# Altium PCB walle-eye-stereo.PcbDoc (part 1 of 2)
Units mil, origin at the board's own origin, x right, y up, seen from the top; angles counter-clockwise.
Board outline 1865.45 x 699.12 mil, 4 copper layers (Top Layer, SIG1, SIG2, Bottom Layer), stack 23.756 mil thick; 36 components, 55 nets, 245 pads, 155 vias.
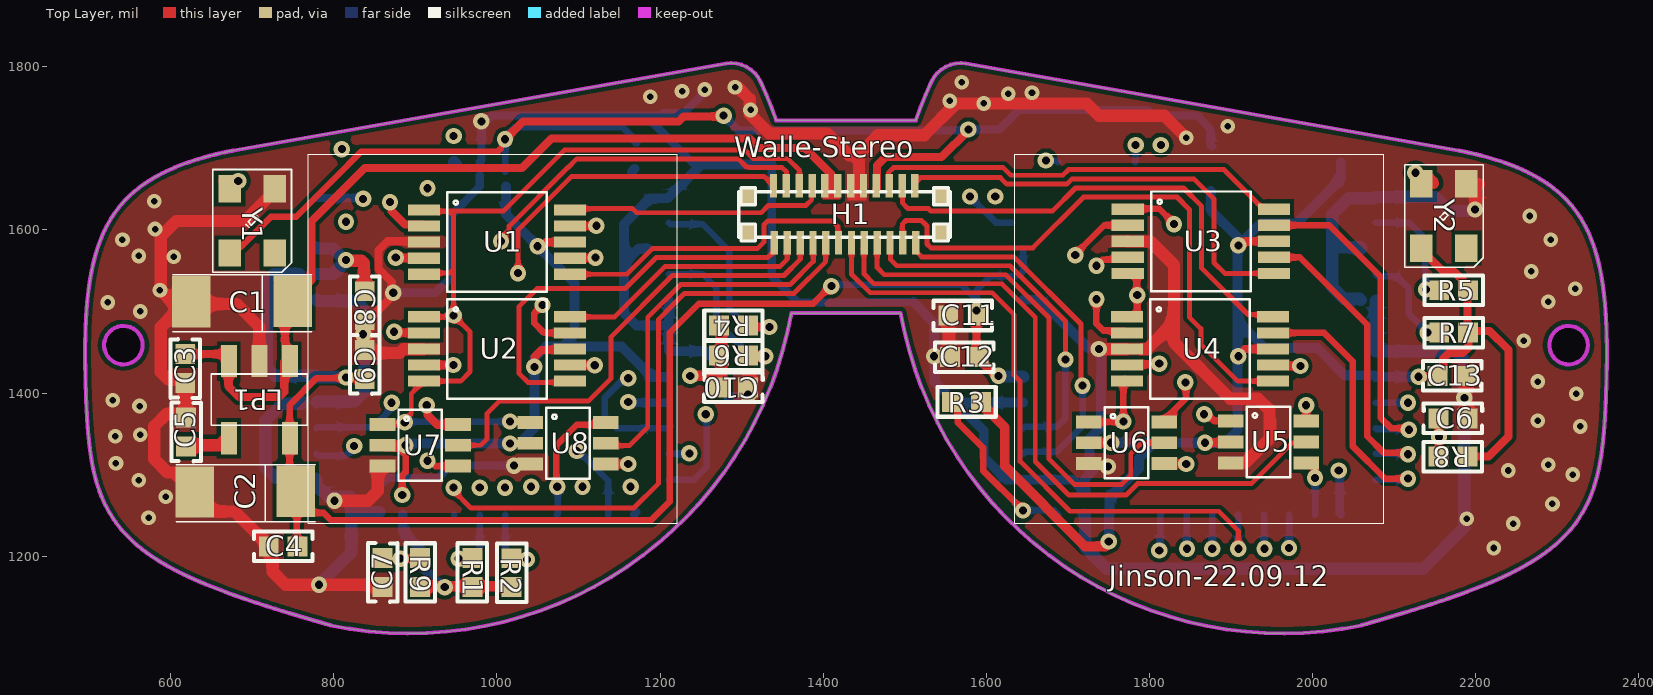
[diagram p0: Top Layer view]
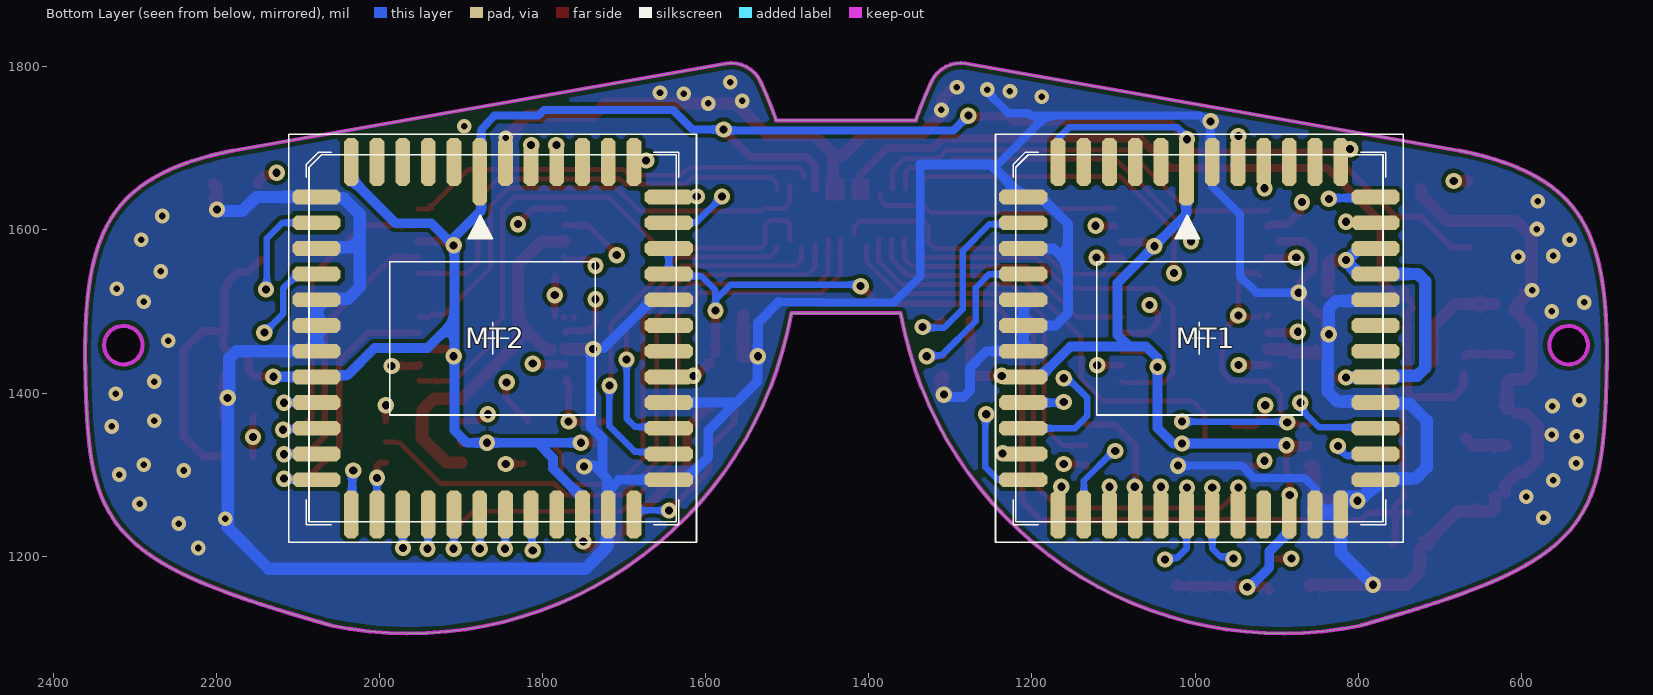
[diagram p1: Bottom Layer view, seen from below]
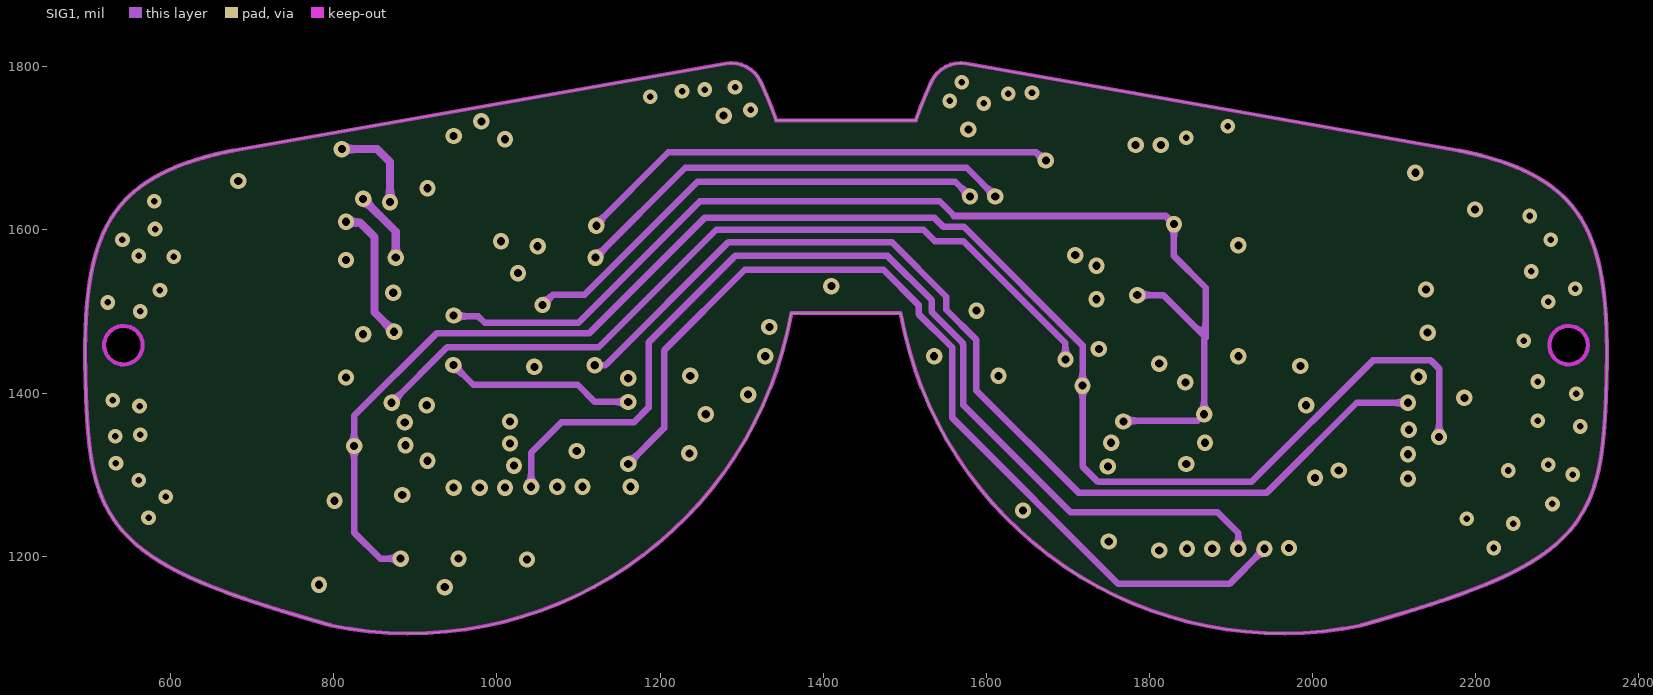
[diagram p2: SIG1]
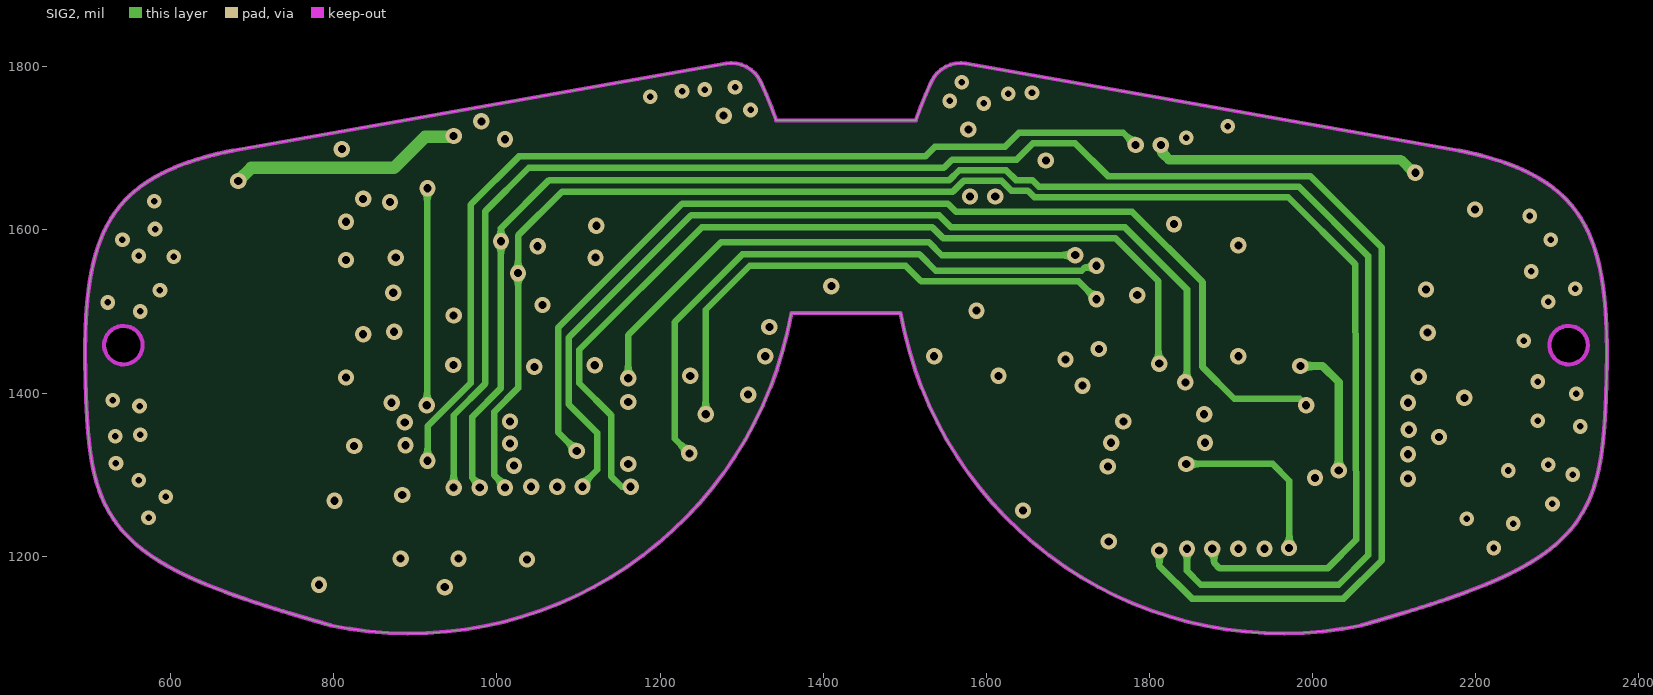
[diagram p3: SIG2]

## Layer stack, top to bottom
Top Solder: solder mask 0.4, Solder Resist, Dk 3.5
Top Layer: signal copper 1.4
Dielectric 1: prepreg 2.8, PP-006, Dk 4.1
SIG1: signal copper 1.3779
Dielectric1: dielectric 12.6, FR-4, Dk 4.8
SIG2: signal copper 1.3779
Dielectric 2: prepreg 2.8, PP-006, Dk 4.1
Bottom Layer: signal copper 1.4
Bottom Solder: solder mask 0.4, Solder Resist, Dk 3.5

## Board outline
1440 vertices, not listed, extent 495.25,1105.26 2360.7,1804.38
cut-out: 2290.18,1458.67 ccw(c2313.8,1458.67) 2313.8,1435.05 ccw(c2313.8,1458.67) 2337.43,1458.67 ccw(c2313.8,1458.67) 2313.8,1482.29 ccw(c2313.8,1458.67)
cut-out: 542.15,1435.05 cw(c542.15,1458.67) 518.53,1458.67 cw(c542.15,1458.67) 542.15,1482.29 cw(c542.15,1458.67) 565.77,1458.67 cw(c542.15,1458.67)

## Design rules (kind name [scope] priority, off if disabled: settings)
Clearance [All] p1: gap=5 ignorepadtopadclearanceinfootprint=FALSE
ComponentClearance [All] p1: gap=0 collisioncheckmode=3 verticalgap=0 showdistances=FALSE
FabricationTestPointUsage TestPointUsage [All] p1: valid=0 allowmultiple=FALSE
FabricationTestpoint Testpoint [All] p1: side=3 testpointundercomponent=TRUE minsize=40 maxsize=100 preferedsize=60 minholesize=0 maxholesize=40 preferedholesize=32 testpointgrid=1 allowsidetop=TRUE allowsidebottom=TRUE usegrid=TRUE gridtolerance=0.01
HoleToHoleClearance [All] p1: gap=0 allowstackedmicrovias=TRUE
MinimumSolderMaskSliver [All] p1: minsoldermaskwidth=0
PolygonConnect [All] p1: connectstyle=Direct reliefconductorwidth=10 reliefentries=4 polygonreliefangle="90 Angle" airgapwidth=10
RoutingVias [All] p1: holewidth=8 width=50 viastyle="Through Hole" minholewidth=6 minwidth=8 maxholewidth=50 maxwidth=100
SilkToSilkClearance [All] p1: silktosilkclearance=0
SilkToSolderMaskClearance [IsPad] p1: minsilkscreentomaskgap=0 clearancetoexposedcopper=TRUE
SolderMaskExpansion [All] p1: expansion=4
Width [All] p1: maxlimit=50 minlimit=6 preferedwidth=8
23 further rules are at their usual default settings.

## Components (designator, comment, footprint, x,y, rotation, side; value= is the part's Value field where it differs from the comment)
C1 "47uf" 3225_C 698,1515 r180 top
C2 "47uf" 3225_C 702,1282 r180 top
C3 "Cap" C0402 618,1430 r90 top value=104
C4 "Cap" C0402 738,1212 r180 top value=104
C5 "Cap" C0402 619,1352.27 r270 top value=10nf
C6 "10uf" C0402 2172,1369 r180 top
C7 "10uf" C0402 860,1180 r270 top
C8 "0.1uf" C0402 838,1507 r270 top
C9 "0.1uf" C0402 838,1435 r90 top
C10 "0.1uf" C0402 1290,1407 r0 top
C11 "0.1uf" C0402 1571,1495 r180 top
C12 "0.1uf" C0402 1573,1444 r180 top
C13 "0.1uf" C0402 2171,1421 r0 top
H1 "HEADER_12PX2" 松下AXE-24PIN-0.4mm-header 1426.13,1620.39 r0 top
LP1 "*3.3V稳压" SOT23-5 711,1397 r0 top
MT1 "MT9V034" CLCC_48 994.73,1467 r180 bottom
MT2 "MT9V034" CLCC_48 1861.23,1467 r180 bottom
R1 "Res2" R0402 970,1180 r270 top value=3.3K
R2 "Res2" R0402 1018,1179.73 r270 top value=3.3K
R3 "Res2" R0402 1575.73,1389 r0 top value=10K
R4 "Res2" R0402 1290,1483 r180 top value=10K
R5 "Res2" R0402 2173,1526 r0 top value=10K
R6 "Res2" R0402 1290,1446 r180 top value=10K
R7 "Res2" R0402 2173,1474 r0 top value=10K
R8 "10K" R0402 2172,1322 r180 top
R9 "10K" R0402 906,1180 r90 top
U1 "SPDT" MSOP-10 1000,1585 r270 top
U2 "SPDT" MSOP-10 1000,1454 r270 top
U3 "SPDT" MSOP-10 1863,1586 r270 top
U4 "SPDT" MSOP-10 1862,1454 r270 top
U5 "SPDT" SC70-6 1946,1340 r270 top
U6 "SPDT" SC70-6 1772,1339 r270 top
U7 "SPDT" SC70-6 906,1336 r270 top
U8 "SPDT" SC70-6 1087.26,1338.41 r270 top
Y1 "24.000Mhz" X3225 700,1611 r90 top
Y2 "24.000Mhz" X3225 2161,1617 r90 top

## Footprints (in the part's own frame and the unit in brackets; to place one, negate y for a bottom-side part, rotate by r counter-clockwise, add the part's x,y. Pads: shape width x height; smd on the part's side, far side on the other; paste and mask are expansions set on the pad)
3225_C [mm]
  rect 1.2x1.6 smd: 1(-1.309,0.062) 2(1.845,0.085)
  silkscreen extent -1.91,-0.76 2.41,1.02
C0402 [mm]
  rect 0.62x0.62 smd: 1(-0.45,0) 2(0.45,0)
  silkscreen extent -0.91,-0.46 0.91,0.46, body extent -0.73,-0.25 0.73,0.25, height 0.51
CLCC_48 [mm] "LCC, 48-Pins, Body 11.43mmx11.43mmx2.30mm, Pitch 0.80mm, IPC Medium Density"
  oct 0.46x2.1 smd: 1(-0.4,5.182)
  oct 0.46x1.5 smd: 2(-1.2,5.486) 3(-2,5.486) 4(-2.8,5.486) 5(-3.6,5.486) 6(-4.4,5.486) 19(-4.4,-5.486) 20(-3.6,-5.486) 21(-2.8,-5.486) 22(-2,-5.486) 23(-1.2,-5.486) 24(-0.4,-5.486) 25(0.4,-5.486) 26(1.2,-5.486) 27(2,-5.486) 28(2.8,-5.486) 29(3.6,-5.486) 30(4.4,-5.486) 43(4.4,5.486) 44(3.6,5.486) 45(2.8,5.486) 46(2,5.486) 47(1.2,5.486) 48(0.4,5.486)
  oct 1.5x0.46 smd: 7(-5.486,4.4) 8(-5.486,3.6) 9(-5.486,2.8) 10(-5.486,2) 11(-5.486,1.2) 12(-5.486,0.4) 13(-5.486,-0.4) 14(-5.486,-1.2) 15(-5.486,-2) 16(-5.486,-2.8) 17(-5.486,-3.6) 18(-5.486,-4.4) 31(5.486,-4.4) 32(5.486,-3.6) 33(5.486,-2.8) 34(5.486,-2) 35(5.486,-1.2) 36(5.486,-0.4) 37(5.486,0.4) 38(5.486,1.2) 39(5.486,2) 40(5.486,2.8) 41(5.486,3.6) 42(5.486,4.4)
  silkscreen extent -6.35,-6.35 6.35,6.35, body extent -5.7,-5.7 5.7,5.7, height 2.3
MSOP-10 [mm]
  rect 0.35x1 smd: 1(-1,-2.275) 2(-0.5,-2.275) 3(0,-2.275) 4(0.5,-2.275) 5(1,-2.275) 6(1,2.275) 7(0.5,2.275) 8(0,2.275) 9(-0.5,2.275) 10(-1,2.275)
  silkscreen extent -1.55,-1.55 1.55,1.55
R0402 [mm]
  rect 0.62x0.62 smd: 1(-0.45,0) 2(0.45,0)
  silkscreen extent -0.91,-0.46 0.91,0.46, body extent -0.73,-0.25 0.73,0.25, height 0.51
SC70-6 [mm]
  rect 0.4x0.8 smd: 1(-0.65,-1.175) 2(0,-1.175) 3(0.65,-1.175) 4(0.65,1.175) 5(0,1.175) 6(-0.65,1.175)
  silkscreen extent -1.1,-0.67 1.1,0.67
SOT23-5 [mm]
  rect 0.5x1 smd: 1(0.894,1.069) 2(-0.056,1.069) 3(-1.006,1.069) 4(-1.006,-1.331) 5(0.894,-1.331)
  silkscreen extent -1.56,-0.93 1.44,0.67, body extent -1.51,-1.53 1.39,1.27, height 1.09
X3225 [mm]
  rect 0.85x0.7 smd: 1(-1,-0.7) 2(1,-0.7) 3(1,0.7) 4(-1,0.7)
  silkscreen extent -1.6,-1.22 1.6,1.22
松下AXE-24PIN-0.4mm-header [mm] "松下AXE-24PIN-0.4mm"
  rect 0.23x0.73 smd: 1(-2.184,-0.923) 2(-1.784,-0.923) 3(-1.381,-0.923) 4(-0.981,-0.923) 5(-0.586,-0.923) 6(-0.186,-0.923) 7(0.218,-0.923) 8(0.616,-0.923) 9(1.018,-0.923) 10(1.416,-0.923) 11(1.819,-0.923) 12(2.215,-0.923) 13(2.19,0.85) 14(1.794,0.85) 15(1.391,0.85) 16(0.993,0.85) 17(0.591,0.85) 18(0.193,0.85) 19(-0.211,0.85) 20(-0.611,0.85) 21(-1.006,0.85) 22(-1.406,0.85) 23(-1.81,0.85) 24(-2.209,0.85)
  rect 0.45x0.53 smd: ""(-2.997,-0.61) ""(-2.997,0.533) ""(2.997,-0.61) ""(2.997,0.533)
  silkscreen extent -3.3,-0.87 3.3,0.79

## Part data
C1 C2: library part cap_pn
C3 C4 C5: "Capacitor", LatestRevisionDate=17-Jul-2002, LatestRevisionNote="Re-released for DXP Platform.", PackageDescription="Radial Cap, Thru-Hole; 2 Leads; 0.3 in Pin Spacing", PackageReference=RAD-0.3, Published=8-Jun-2000, Publisher="Altium Limited"
C6 C7 C8 C9 C10 C11 C12 C13: library part CAP
LP1: library part LP2985
MT1 MT2: "CMOS", PartNumber=MT9V034C12STM-DP1
R1 R2 R3 R4 R5 R6 R7: "Resistor", LatestRevisionDate=17-Jul-2002, LatestRevisionNote="Re-released for DXP Platform.", PackageDescription="Axial Device, Thru-Hole; 2 Leads; 0.4 in Pin Spacing", PackageReference=AXIAL-0.4, Published=8-Jun-2000, Publisher="Altium Limited"
R8 R9: library part RES
U1 U2 U3 U4: library part sgm3002, "analog switch"
U5 U6 U7 U8: library part sgm3001, "analog switch"
Y1 Y2: library part XTAL_S, "有源晶振"

## Via types
v1: diameter 20, hole 10, Top Layer to Bottom Layer, 110 vias
v2: diameter 18, hole 8, Top Layer to Bottom Layer, 45 vias

## Nets (pads, with @x,y where several pads share a name; then routed paths per layer and width w, separated by ;. In a path a pad name is that pad's centre, name@x,y a point inside that pad or via, vN(x,y) a via of type N, cw(c..) or ccw(c..) an arc to the next point about the centre after c; other vN are vias at no path point)
3.3V-SEN0: C2.1 C4.1 C8.1 C9.1 C11.1 C12.1 LP1.5 MT1.35 MT1.39 MT1.40 MT2.35 MT2.39 MT2.40 | length 2020.7
  Top Layer w8: C2.1@738.15,1253.06 C2.1@754.73,1253.06 ; LP1.5@743.18,1357.42 LP1.5@746,1354.61 ; C2.1@744.53,1279.55 744.53,1271.68 754.73,1261.48 C2.1@754.73,1253.06 ; C2.1@745,1288 746,1289 LP1.5@746,1354.61 ; C4.1@758.03,1214 754.73,1217.3 C2.1@754.73,1253.06 ; v1@815,1418 836.73,1418 C9.1@837,1418.27 ; C9.1@837,1419 836.27,1418.27 779.03,1418.27 746,1385.24 LP1.5@746,1354.61 ; v1@1413,1535 1387.54,1509.54 1247.54,1509.54 1212,1474 1212,1267 1189,1244 796.72,1244 787.66,1253.06 C2.1@754.73,1253.06
  Top Layer w10: v1@1588.72,1508 1588,1508 v1(1588,1501) 1588,1448 C12.1@1589,1447 ; C12.1@1594.04,1438.7 1609.75,1423 v1@1613,1423
  Top Layer w15: v1@815,1564 816.96,1562.04 833.96,1562.04 837,1559 837,1524.73 C8.1@838,1523.73
  Bottom Layer w8: v1@1419,1533 1569.14,1533 1586.09,1516.06 ; v1(1588,1501) 1588,1526 1605.28,1543.28 1636.28,1543.28 MT2.39@1638,1545 ; MT2.39@1643,1547 1645.23,1549.23 MT2.40@1645.23,1577.24
  Bottom Layer w15: MT1.39@758,1546 757.79,1545.79 726.79,1545.79 718,1537 718,1431 727.82,1421.18 777.31,1421.18 MT1.35@778.73,1419.76 779.11,1419.38 814.62,1419.38 v1(815,1419) ; MT1.39@774,1547.3 775.56,1545.74 MT1.39@778.73,1545.74 799.34,1545.74 812.6,1559 v1@814,1559 ; MT1.40@777.31,1578.66 MT1.40@778.73,1577.24 799.34,1577.24 v1@809.58,1567 ; MT2.35@1616,1419.07 1617.31,1420.38 1644.61,1420.38 MT2.35@1645.23,1419.76
  other v1: 1615,1421 1410,1531 815,1563
3.3V-SYS: C10.1 C13.1 H1.16 MT1.1 MT1.6 MT1.14 MT1.28 MT2.1 MT2.6 MT2.14 MT2.28 R1.2 R2.2 R3.2 R4.2 R5.2 R6.2 R7.2 R8.1 R9.1 U1.8 U2.8 U3.8 U4.8 U5.2 U6.2 U7.2 U8.2 Y1.4 Y2.4 | length 4748.4
  Top Layer w8: Y1.4@663.44,1578.63 685.63,1578.63 723,1616 754,1616 817.87,1679.87 817.87,1680 833.87,1696 1001,1696 1004.93,1699.93 ; v1@882,1273 v1(884,1275) 884,1299.12 888,1303.12 888,1324 879.87,1332.13 863.61,1332.13 U7.2@859.74,1336 860.74,1337 v1@887,1337
  Top Layer w10: v1@887,1337 v1(888,1336) ; v1(1010,1711) 1032,1733 1223,1733 1229,1739 v1@1274,1739 ; 1046,1444 1054.88,1452.88 1088.45,1452.88 U2.8@1089.57,1454 ; 1060,1585 U1.8@1089.57,1585 ; H1.16@1465.46,1650 1465.99,1650.53 1465.99,1678.99 1476.22,1689.22 1545.22,1689.22 v1@1578,1722 ; U6.2@1725.74,1339 v1@1752,1339 ; v1(1868,1339) 1898.74,1339 U5.2@1899.74,1340 ; v1@1907,1579 1909.71,1579 1916.71,1586 U3.8@1952.57,1586 ; 1916.88,1453.88 1951.45,1453.88 U4.8@1951.57,1454 ; v1@2129,1420 2129.5,1420.5 2153.77,1420.5 2160.08,1426.81 2160.08,1441.97 2167.11,1449 2183.97,1449 2191,1456.03 R7.2@2191,1465 ; Y2.4@2145.72,1563.28 2160.8,1548.2 2173.8,1548.2 2186,1536 2186,1530.72 2189.73,1526.98 2189.73,1473.27 R7.2@2191,1472 ; R8.1@2188.73,1322 2215.54,1322 2240,1346.46 2240,1453 2217,1476 R7.2@2198,1476
  Top Layer w12: R9.1@909,1158 909,1159.34 912.8,1163.13 1017.87,1163.13 R2.2@1018,1163 ; R2.2@1021,1166 R2.2@1024,1163 ; v1@1237,1420 1238,1421 1275.27,1421 1275.27,1420.02 ; v1(1237,1421) v1@1237.25,1421 ; C10.1@1275,1418 1275.77,1418.77 R4.2@1275.77,1489 ; R3.2@1592.46,1389 1592.46,1388.02 1622.64,1357.84 1622.64,1310.36 1721,1212 1746,1212 v1@1753,1219
  Bottom Layer w8: MT1.1@1010.24,1671.24 MT1.1@1010.48,1671 1010.48,1714.48 1022,1726 1154,1726 1167.96,1712.04 1167.96,1708.53 1170.49,1706 MT1.6@1172,1706
  Bottom Layer w10: v1(1278,1740) 1296.24,1721.76 1576.76,1721.76 v1(1578,1723) 1616,1723 1640,1747 1798,1747 1805,1740 1822,1740 ; 1824,1740 1858.9,1740 1863.95,1734.95 1874.93,1723.07 1874.93,1704.07 MT2.1@1877,1702
  Bottom Layer w12: MT1.28@884.5,1251 884.5,1230.53 909,1206.02 909,1186 v1@932,1163 ; v1@897,1338 v1(1016,1338) 1027,1338 1046,1357 v1(1046,1432) ; MT1.1@1011,1653 1011,1619 v1(1050,1580) 1095,1535 1095,1471 1082,1458 ; 1046,1443 1060,1457 1153.02,1457 1190.26,1419.76 MT1.14@1210.73,1419.76 ; MT1.6@1165.5,1671.5 MT1.6@1169,1675 ; v1@1751,1217 1750.5,1217.5 1750.5,1250.5 MT2.28@1750.99,1251 1750.99,1271.47 1787,1307.48 1787,1320 1805,1338 ; v1@1754,1339 v1(1868,1339) 1893,1339 1908,1354 1908,1488 ; MT2.1@1875,1648 1875,1624 1908,1591 ; v1@1908,1581 1908,1488 ; v1@1911,1584 1911,1582.7 1936.3,1608 1979.93,1608 2034.46,1662.53 MT2.6@2034.46,1683 ; v1@2131,1419 2130.12,1419.88 2077.35,1419.88 MT2.14@2077.23,1419.76 2075.19,1421.8 2039.2,1421.8 2006,1455 1941,1455 1908,1488
  other v1: 936,1162 1750,1218 1753,1339 2130,1420 1909,1445 1909,1581
CAM0_D2: MT1.43 U1.2 | length 164.2
  Top Layer w10: 870.91,1623.17 887.51,1606.57 908.54,1606.57 U1.2@910.43,1604.68
  SIG1 w10: v1(810,1699) 853,1699 869,1683 v1(869,1634) 869,1633 v1@870,1632
CAM0_D3: MT1.42 U1.4 | length 181.9
  Top Layer w10: v1(876,1566) 876.34,1565.66 910.09,1565.66 U1.4@910.43,1565.32
  SIG1 w10: v1(836,1638) 876,1598 v1(876,1566)
  Bottom Layer w10: MT1.42@778.73,1640.23 779.85,1639.11 833.89,1639.11 v1@836,1637
CAM0_D4: MT1.41 U2.2 | length 205
  Top Layer w10: v1@874,1474 874.16,1473.84 910.28,1473.84 U2.2@910.43,1473.68
  SIG1 w10: v1@815,1609 832,1609 850,1591 850,1499 v1(874,1475)
  other v1: 815,1610
CAM0_D5: MT1.15 U2.4 | length 320.2
  Top Layer w10: U2.4@910.43,1434.32 v1(946.68,1434.32)
  SIG1 w8: v1(946.68,1434.32) 971,1410 1099,1410 1120,1389 v1(1161,1389)
  Bottom Layer w10: v1@1160,1388 1210.47,1388 MT1.15@1210.73,1388.26
CAM0_D6: MT1.16 U3.2 | length 883.8
  Top Layer w8: v1(1709,1569) 1709,1570 1744.68,1605.68 U3.2@1773.43,1605.68
  SIG2 w8: v1(1161,1418) 1161,1471 1275,1585 1529.5,1585 1545.5,1569 v1(1709,1569)
  Bottom Layer w8: v1@1159,1421 1132,1394 1132,1372 1147.24,1356.76 MT1.16@1210.73,1356.76 MT1.16@1213.19,1359.22
CAM0_D7: MT1.17 U3.4 | length 808.7
  Top Layer w8: v1(1735,1556) 1742.43,1563.43 1770.54,1563.43 U3.4@1773.43,1566.32
  SIG2 w8: v1@1238,1325 1237,1325 1218,1344 1218,1487 1301,1570 1518,1570 1538,1550 1716.87,1550 1720.57,1553.7 1733.7,1553.7 v1@1737,1557
  Bottom Layer w8: MT1.17@1210.73,1325.27 v1@1241.27,1325.27
  other v1: 1236,1326
CAM0_D8: MT1.18 U4.2 | length 827
  Top Layer w8: v1(1735,1515) 1735,1485 1743.43,1476.57 1769.54,1476.57 U4.2@1772.43,1473.68
  SIG2 w8: v1(1256,1374) 1256,1502 1310,1556 1501,1556 1520,1537 1713,1537 v1(1735,1515)
  Bottom Layer w8: MT1.18@1210.73,1293.77 1241.77,1293.77 1257,1309 v1@1257,1365
CAM0_D9: MT1.19 U4.4 | length 1144.8
  Top Layer w10: U4.4@1772.43,1434.32 1773.24,1435.12 1807.12,1435.12 v1@1810,1438
  SIG2 w8: v1(1164,1285) 1153,1285 1140,1298 1140,1373 1101,1412 1101,1453 1251,1603 1534,1603 1547,1590 1758,1590 1811,1537 1811,1437 v1(1812,1436)
  Bottom Layer w10: MT1.19@1167.96,1251 MT1.19@1170.96,1254
CAM1_D2: MT2.43 U1.9 | length 634.7
  Top Layer w8: U1.9@1098,1604 1098.84,1604.84 1121.84,1604.84 v1(1122,1605)
  SIG1 w8: v1(1122,1605) 1122,1607 1210,1695 1661,1695 v1@1673,1683
  Bottom Layer w8: v1(1673,1685) 1686,1685 MT2.43@1688,1683
CAM1_D3: MT2.42 U1.7 | length 581.8
  Top Layer w8: U1.7@1089.57,1565.32 1089.91,1565.66 1120.66,1565.66 v1(1121,1566)
  SIG1 w8: v1(1121,1566) 1231,1676 1576,1676 v1(1611,1641)
CAM1_D4: MT2.41 U2.9 | length 740.5
  Top Layer w8: v1@1058,1514 1058,1510 v1(1056,1508) 1046,1498 1046,1485.57 1057.88,1473.68 U2.9@1089.57,1473.68
  SIG1 w8: v1@1056,1510 1058,1510 1068.5,1520.5 1107.5,1520.5 1246,1659 1562,1659 v1(1580,1641)
  Bottom Layer w8: v1(1580,1641) 1580,1640.7 1611.7,1609 MT2.41@1632,1609
CAM1_D5: MT2.15 U2.7 | length 1346.2
  Top Layer w8: U2.7@1089.57,1434.32 1089.88,1434 v1@1118,1434
  SIG1 w8: v1(1120,1434) 1133,1434 1284,1585 1484,1585 1551,1518 1551,1502 1587.5,1465.5 1587.5,1403.5 1713,1278 1944,1278 2054,1388 v1(2117,1388)
  Bottom Layer w8: MT2.15@2077.23,1388.26 2077.36,1388.13 2113.87,1388.13 v1@2116,1386
CAM1_D6: MT2.16 U3.9 | length 406.8
  Top Layer w8: U3.9@1952.57,1605.68 2020.32,1605.68 2083.5,1542.5 2083.5,1369.5 2096,1357 2112.46,1357 2115,1354.46 v1@2115,1354
  Bottom Layer w8: MT2.16@2077.23,1356.76 2078.11,1355.88 2114.12,1355.88 v1@2115,1355
  other v1: 2118,1355
CAM1_D7: MT2.17 U3.7 | length 384.3
  Top Layer w8: U3.7@1952.57,1566.32 1984.25,1566.32 2067,1483.57 2067,1347 2087,1327 2113.62,1327 2116,1324.62 v1@2116,1324
  Bottom Layer w8: MT2.17@2077.23,1325.27 2077.59,1325.63 2116.37,1325.63 v1(2117,1325)
CAM1_D8: MT2.18 U4.9 | length 331.5
  Top Layer w8: U4.9@1951.57,1473.68 2014.32,1473.68 2049,1439 2049,1335 2089,1295 v1@2109,1295
  Bottom Layer w8: MT2.18@2077.23,1293.77 2077.61,1293.39 2115.61,1293.39 v1@2116,1293
  other v1: 2117,1295
CAM1_D9: MT2.19 U4.7 | length 251
  Top Layer w10: U4.7@1951.57,1434.32 1952.88,1433 1981,1433 v1@1984.2,1436.2
  SIG2 w10: v1(1985,1433) 2012.28,1433 2032,1413.28 v1@2032,1309
  Bottom Layer w10: v1@2032,1307 2033.23,1305.77 2033.23,1252.23 MT2.19@2034.46,1251
  other v1: 2032,1305
CAM_D2: H1.21 U1.10 | length 304.4
  Top Layer w6: U1.10@1098.57,1625.37 1099.2,1626 1166.37,1626 1171.37,1621 1324,1621 1333,1630 1379,1630 1386,1637 H1.21@1386,1645
CAM_D3: H1.6 U1.6 | length 379.9
  Top Layer w6: U1.6@1089.57,1545.63 1159.07,1545.63 1190.44,1577 1319.35,1577 1327.63,1585.28 1327.63,1606.63 1332,1611 1411,1611 1418,1604 H1.6@1418,1595
CAM_D4: H1.2 U2.10 | length 324.9
  Top Layer w6: U2.10@1089.57,1493.37 1144.37,1493.37 1206,1555 1347,1555 1356,1564 H1.2@1356,1573 ; H1.2@1354.66,1573 H1.2@1356,1573 ; H1.2@1355.13,1589.09 1357,1587.23 1357,1573 H1.2@1356,1573 ; H1.2@1356,1574 H1.2@1356,1573
CAM_D5: H1.1 U2.6 | length 500.9
  Top Layer w6: U2.6@1089.57,1414.63 1087.94,1413 1038.13,1413 1027,1424.13 1027,1505.87 1049.13,1528 1157,1528 1195,1566 1331.94,1566 1340.16,1574.22 H1.1@1340.16,1584.06
CAM_D6: H1.15 U3.10 | length 508
  Top Layer w6: H1.15@1480,1664 1480,1670 1486.22,1676.22 1620.72,1676.22 1629.94,1667 1693.89,1667 1700.89,1674 1891.14,1674 1939.77,1625.37 U3.10@1952.57,1625.37
CAM_D7: H1.13 U3.6 | length 549.6
  Top Layer w6: H1.13@1512.59,1650 1512.59,1657.47 1519.12,1664 1617.22,1664 1625.22,1656 1698.44,1656 1704.7,1662.26 1854.74,1662.26 1879,1638 1879,1560 1892.37,1546.63 U3.6@1952.57,1546.63
CAM_D8: H1.14 U4.10 | length 598.3
  Top Layer w6: H1.14@1496.75,1653.85 1497,1653.6 1497,1633 1504,1626 1528.92,1626 1531.96,1622.96 1556.31,1622.96 ; 1559.35,1623 1681,1623 1709.26,1651.26 1841.74,1651.26 1864,1629 1864,1553 1920.74,1496.26 1935.88,1496.26 1938.77,1493.37 U4.10@1951.57,1493.37
CAM_D9: H1.11 U4.6 | length 712.5
  Top Layer w6: H1.11@1496,1587 1497,1588 1497,1607 1501.51,1611.51 1520.38,1611.51 1522.95,1608.95 ; 1523,1609 1527.28,1604.72 1527.28,1582.65 1531.96,1577.96 1576.95,1577.96 1576.99,1578 1657,1578 1719.26,1640.26 1833.74,1640.26 1849,1625 1849,1493 1863,1479 1863,1460 1908.37,1414.63 1948.83,1414.63 1950.2,1416 U4.6@1951.57,1414.63
CAM_SW: H1.22 U1.1 U1.5 U2.1 U2.5 U3.1 U3.5 U4.1 U4.5 U5.1 U6.1 U7.1 U8.1 | length 2724.1
  Top Layer w6: U7.1@859.74,1361.59 881.59,1361.59 895,1375 895,1399 U2.5@908,1412 ; U2.5@910.43,1414.63 955.63,1414.63 967,1426 967,1475 v1@948.63,1493.37 ; U1.1@910.43,1624.37 911.92,1622.88 942.12,1622.88 ; U2.1@921,1495 922.63,1493.37 v1@948.63,1493.37 ; U1.5@921,1544 924.12,1547.12 942.12,1547.12 947,1552 v1(947,1495) v1@948.63,1493.37 ; 947,1555 947,1618 942.12,1622.88 ; 1314,1687.22 1356.78,1687.22 1371.02,1672.98 H1.22@1371.02,1650 ; 1314,1688 1304,1698 1083,1698 1007.88,1622.88 942.12,1622.88
  Top Layer w8: U2.1@910.43,1495.57 U2.1@912,1494 ; U6.1@1725.74,1364.59 v1@1766.31,1364.59 ; U4.1@1761,1493 U4.1@1762,1492 ; v1@1769,1364 v1(1768,1365) 1768,1411.74 1770.89,1414.63 U4.5@1772.43,1414.63 U4.5@1769.54,1417.52 ; U4.1@1773.43,1492.57 U4.1@1774,1492 ; U3.1@1773.43,1625.37 1774.06,1626 1812,1626 v1@1830,1608 ; v1@1784.43,1517 U3.5@1784.43,1543.63 ; U4.1@1785,1494 v1(1785,1520) ; v1@1871,1374 1879,1366 1891.46,1366 1891.87,1365.59 U5.1@1899.74,1365.59
  SIG1 w8: v1(947,1495) 948,1494 977,1494 985,1486 1100,1486 1249,1635 1543,1635 1560,1618 1560,1617 1820,1617 v1(1830,1607) 1830,1568 1869,1529 1869,1468 ; v1@1770,1366 1859,1366 v1(1867,1374) 1867,1466 1869,1468 ; v1@1786,1520 1817,1520 1869,1468
  Bottom Layer w8: v1@891,1365 v1(1016,1365)
  other v1: 887,1364
DCMI_HSYNC: H1.8 U5.5 | length 828.6
  Top Layer w6: H1.8@1449,1577 1450,1576 1450,1546 1462.04,1533.96 1619.04,1533.96 1660,1493 1660,1316 1701,1275 1771.38,1275 1785.38,1289 1925,1289 1975,1339 1980,1339 1981,1340 U5.5@1992.26,1340 ; H1.8@1449.64,1577 H1.8@1449.64,1589.09
DCMI_PCLK: H1.3 U7.5 | length 587.7
  Top Layer w6: U7.5@952.26,1336 980.01,1336 988,1343.99 988,1375 1003,1390 1112,1390 1140,1418 1140,1469 1215,1544 1352,1544 1372,1564 1372,1588.11 H1.3@1371.02,1589.09
DCMI_VSYNC: H1.9 U6.5 | length 629.4
  Top Layer w6: H1.9@1466,1583 1466,1554 1475.04,1544.96 1624.04,1544.96 1677,1492 1677,1319 1708,1288 1766,1288 1777,1299 1777,1325.49 1790.51,1339 U6.5@1818.26,1339
EXP: H1.7 MT1.23 MT2.23 | length 2080.7
  Top Layer w6: H1.7@1433.97,1589.09 1434.72,1588.35 1434.72,1545.73 1457.48,1522.96 1607.04,1522.96 1634,1496 1634,1422 1641.5,1414.5 1641.5,1316.12 1702.62,1255 1885,1255 1909,1231 v1(1909,1209)
  SIG1 w8: v1@1042,1287 1042,1327 1079,1364 1167.87,1364 1186,1382.13 1186,1462 1292,1568 1479,1568 1533,1514 1533,1499.38 1571,1461.38 1571,1460 1572,1459 1572,1385 1703,1254 1883,1254 1909,1228 v1@1909,1211 ; v1@1909,1208 v1@1910,1208
  Bottom Layer w8: MT2.23@1908.47,1251 1908.74,1250.74 1908.74,1207.26 v1@1909,1207
  other v1: 1042,1285
GND-SEN: C1.2 C2.2 C3.1 C4.2 C5.1 C6.1 C7.2 C8.2 C9.2 C10.2 C11.2 C12.2 C13.2 H1.17 H1.18 LP1.2 MT1.7 MT1.9 MT1.11 MT1.12 MT1.13 MT1.29 MT1.30 MT1.31 MT1.34 MT1.38 MT1.48 MT2.7 MT2.9 MT2.11 MT2.12 MT2.13 MT2.29 MT2.31 MT2.34 MT2.38 MT2.48 U1.3 U2.3 U3.3 U4.3 U5.3 U6.3 U7.3 U8.3 Y1.2 Y2.2 | length 7139.2
  Top Layer w10: C8.2@838,1490.27 844.81,1497.08 850.09,1497.08 867.02,1514 v1@867.02,1522 ; v1@870.51,1525.49 871.09,1526.07 871.09,1535.91 855,1552 855,1575 866,1586 U1.3@896,1586
  Top Layer w12: v1@782,1168 v1@783,1167
  Top Layer w15: C1.2@604,1510 588,1526 588,1592 607,1611 691,1611 722.99,1642.99 Y1.2@722.99,1649.99 ; 606,1375 595.77,1375 579.99,1359.21 579.99,1319 596.35,1302.64 604.23,1302.64 620.35,1286.51 C2.2@620.35,1278.64 ; C1.2@609,1502 588,1481 588,1425.78 596.79,1416.99 613.3,1416.99 C3.1@618,1412.28 ; C5.1@618,1380.31 C3.1@618,1406.27 ; C2.2@632,1273 632,1259.11 636.47,1254.64 678.62,1254.64 715.97,1217.3 716.96,1217.3 C4.2@721.27,1212.98 ; C1.2@633,1509 681.04,1509 708.78,1481.25 LP1.2@708.78,1439.07 ; C4.2@720.28,1212 724.99,1207.3 724.99,1181.01 741,1165 v1(782,1165) 858.27,1165 C7.2@860,1163.27 ; v1@802,1268 842,1268 854.04,1280.04 854.04,1310.04 854.41,1310.41 U7.3@859.74,1310.41 ; C9.2@838,1454 C8.2@838,1489.28 C8.2@838,1490.27 ; C9.2@845,1449 880.87,1449 885.57,1453.7 910.14,1453.7 U2.3@910.43,1454 ; v2@1295,1775 1310,1760 1310,1742 1334,1718 1405,1718 1432,1691 1442,1691 ; C10.2@1309.72,1419 C10.2@1308.73,1418.02 ; C10.2@1311,1403 1311,1415.75 C10.2@1308.73,1418.02 ; C10.2@1313.04,1416.69 1308.73,1421 C10.2@1308.73,1418.02 ; 1441,1687 1441,1690 1442,1691 ; 1444,1650 1444,1691 1442,1691 ; v1@1538.31,1444.5 1555.5,1444.5 1554.28,1445.72 1554.28,1494 C11.2@1553.28,1495 ; v1@1740.7,1453.7 1772.14,1453.7 U4.3@1772.43,1454 ; U3.3@1773.43,1586 1773.73,1585.7 1801.3,1585.7 1830,1557 1830,1487 ; U4.3@1790,1453.7 1796.71,1453.7 1830,1487 ; v2(1845,1713) 1818,1740 1738,1740 1723,1755 v2(1597,1755) 1563,1755 1524,1716 1467,1716 1442,1691 ; U5.3@1899.74,1314.41 1900.11,1314.78 1917.78,1314.78 1948,1345 1948,1366 ; 1947,1346 1947,1379 1933,1393 1899,1393 1830,1462 1830,1487 ; C6.1@2187,1369 2188.23,1370.23 2188.23,1420.5 C13.2@2187.73,1421 ; v1@2198,1624 v1(2199,1625) 2199.96,1625.96 2199.96,1652.77 2203.56,1656.37
  Bottom Layer w10: MT1.29@852,1277 852,1282 866,1296 927.72,1296 942.72,1311 v1(1021,1311) ; v1(873,1523) 925,1523 945,1543 945,1619 978.98,1652.98 MT1.48@978.98,1666.98 ; MT1.48@978.98,1683 981.25,1685.26 981.25,1727.53 993.43,1739.71 995.07,1740 1182,1740 ; 1246.25,1675.75 1182,1740 ; v2@1257,1771 1229,1743 1204,1743 1201,1740 1182,1740 ; 1337,1680 1337,1543 1369,1511 1455.82,1511 1456.36,1511.54 1510.46,1511.54
  Bottom Layer w12: MT1.9@1185,1577 1174,1577 1156,1559 ; MT1.11@1210.73,1514.24 MT1.12@1210.73,1482.75 ; v1@1308,1395 1284,1395 1276,1403 1276,1431 1255.75,1451.25 1211.75,1451.25 1210.73,1452.27 MT1.12@1210.73,1482.75 ; 1337,1680 1250.5,1680 1246.25,1675.75 MT1.7@1210.73,1640.23 1209.31,1638.81 1187.81,1638.81 1156,1607 1156,1559 ; 1510.46,1511.54 1536,1486 v1(1536,1445) ; v1@1536.5,1441 1536.5,1414 1562.24,1388.26 1562.74,1388.26 ; MT2.34@1645.23,1388.26 1562.74,1388.26 ; MT2.38@1645.23,1514.24 1665.7,1514.24 1724.99,1454.96 v1@1736.04,1454.96 ; v1@1741,1452 1741,1418.82 1740.5,1418.32 1740.5,1358.32 1726.5,1344.32 1726.5,1300.5 ; v1@1749,1311 1737,1311 1726.5,1300.5 ; 1156,1559 1156,1498 1171.25,1482.75 MT1.12@1210.73,1482.75 ; 1562.74,1388.26 1596.73,1354.27 1596.73,1321.8 1624.76,1293.77 MT2.31@1645.23,1293.77 1706.23,1293.77 1721,1279 1721,1295 1726.5,1300.5
  Bottom Layer w15: MT1.34@763,1389 760.84,1386.84 736.84,1386.84 716,1366 716,1309 729.81,1295.19 777.31,1295.19 MT1.31@778.73,1293.77 ; MT1.31@776,1290 793.11,1272.89 819.95,1272.89 819.95,1261 821.5,1259.44 MT1.30@821.5,1252.44 ; MT1.34@778.73,1388.26 780.15,1389.68 825.68,1389.68 837.5,1401.5 837.5,1439.15 836.96,1439.69 836.96,1469.96 v1@837,1470 ; MT1.38@778.73,1514.24 780.15,1512.82 827.18,1512.82 835.96,1504.04 v1(836,1472) v1(836,1472) ; v1@781,1164 v1(782,1165) 821.5,1204.5 MT1.30@821.5,1251 MT1.30@821.5,1252.44 ; MT1.29@856,1254 823.06,1254 MT1.30@821.5,1252.44 ; MT2.29@1719.5,1251 1720.92,1249.58 1720.92,1211.08 1747.5,1184.5 2135.5,1184.5 2186,1235 v1(2186,1394) 2186,1395 v1@2187,1396 ; MT2.11@2059,1514 2057.33,1515.67 2038.33,1515.67 2024,1530 2024,1589 ; MT2.9@2060,1577 2058.34,1578.66 2034.34,1578.66 2024,1589 ; MT2.11@2080,1513 2077.54,1513 2077.23,1512.69 MT2.12@2077.23,1482.75 MT2.13@2077.23,1451.25 2175.21,1451.25 2184,1442.47 2184,1399 v1@2186,1397 ; v1@2198,1623 2168,1623 2150.77,1640.23 MT2.7@2077.23,1640.23 2075.81,1638.81 2043.81,1638.81 2024,1619 2024,1589
  other v1: 801,1268 1749,1310 1308,1398 1738,1454 981,1733
  other v2: 2222,1210 2246,1240 2189,1246 573,1247 2294,1264 594,1273 561,1293 2319,1300 2240,1305 2289,1312 533,1314 532,1347 563,1349 2328,1359 2276,1366 562,1384 529,1391 2323,1399 2276,1414 2259,1464 563,1500 523,1511 2289,1512 587,1526 2322,1528 2268,1549 604,1567 561,1568 541,1588 2292,1588 581,1601 2266,1617 580,1635 1896,1727 1311,1747 1555,1758 1188,1763 1627,1767 1656,1768 1227,1770 1255,1772 1292,1775 1570,1781
HSYNC0: MT1.20 U5.6 | length 1416.6
  Top Layer w8: U5.6@1992.26,1365.59 1992,1365.85 1992,1380 v1@1995,1383
  SIG2 w8: v1(1098,1329) 1075,1352 1075,1480 1227,1632 1553,1632 1563,1622 1779,1622 1865,1536 1865,1432 1904,1393 1984,1393 v1(1992,1385)
  Bottom Layer w8: v1@1100,1330 1100,1328.99 1136.46,1292.53 MT1.20@1136.46,1251
HSYNC1: MT2.20 U5.4 | length 66.9
  Top Layer w8: U5.4@1992.26,1314.41 1999.13,1314.41 2003,1310.54 v1@2003,1298
  Bottom Layer w8: MT2.20@2002.96,1251 MT2.20@2002.96,1251 v1@2003,1293
  other v1: 2003,1296
I2C_SCL: H1.23 MT1.25 MT2.25 R1.1 | length 2647.8
  Top Layer w6: v1(1005,1586) 1005,1589.79 1015,1599.79 1015,1604.66 1086.56,1676.22 ; 1087.22,1676.22 1098,1687 1296,1687 1306,1677 1308.66,1677 1309.44,1676.22 1349.78,1676.22 1355,1671 H1.23@1355,1650.12
  SIG2 w8: v1@979,1287 970,1296 970,1371 1005,1406 v1(1005,1586) 1005,1602 1064,1661 1554.75,1661 1566.75,1673 1624.25,1673 1636.25,1661 1656.38,1661 1664.38,1653 1983,1653 2068,1568 2068,1201 2032,1165 1863,1165 1846,1182 1846,1207 v1@1844,1209
  Bottom Layer w8: v1@952,1196 v1(953,1197) 955.3,1199.3 968.81,1199.3 978.98,1209.47 MT1.25@978.98,1251 ; MT2.25@1845.48,1251 1845.74,1250.74 1845.74,1212.26 v1@1848,1210
  other v1: 1846,1209 979,1284
I2C_SDA: H1.24 MT1.24 MT2.24 R2.1 | length 2479.7
  Top Layer w6: v1(1026,1547) 1026,1600.11 1091.11,1665.22 1327.78,1665.22 H1.24@1340,1653
  SIG2 w8: v1@1010,1288 1008,1288 997,1299 997,1377 1026,1406 v1(1026,1547) 1026,1593 1080,1647 1559.13,1647 1572.13,1660 1618.87,1660 1630.87,1648 1651,1648 1659,1640 1970,1640 2051.98,1558.02 2053.28,1220 2018.29,1185 1886,1185 1879.3,1191.7 1879.3,1204.7 v1@1876,1208
  Bottom Layer w8: MT1.24@1010.48,1251 1010.48,1209.52 1022.17,1197.83 1035.17,1197.83 v1(1037,1196) ; MT2.24@1876.98,1251 1876.99,1212.01 v1@1878,1211
  other v1: 1877,1209 1010,1284
IO1: H1.4 U8.5 | length 455.2
  Top Layer w6: U8.5@1133.52,1335.41 1162.41,1335.41 1185,1358 1185,1492.79 1225.21,1533 1359.59,1533 1388,1561.41 1388,1587.86 H1.4@1386.76,1589.09
IO2: H1.5 MT1.26 MT2.26 | length 3029.2
  Top Layer w6: v1(947,1284) 947,1280 968,1259 1168,1259 1198,1289 1198,1490 1206.5,1498.5 1206.5,1498.73 1229.77,1522 1364.15,1522 1403,1560.85 1403,1580 H1.5@1402.32,1580.68
  SIG2 w8: v1@947,1287 947,1372.75 986,1411.75 986,1623 1039,1676 1548,1676 1558,1686 1637,1686 1657,1706 1709,1706 1749,1666 1997,1666 2085,1578 2085,1195 2038,1148 1852,1148 1812,1188 v1(1812,1207)
  Bottom Layer w8: v1@1812,1204 1812.99,1204.99 1812.99,1250.01 MT2.26@1813.98,1251
NetC5_2: C5.2 LP1.4 | length 52.5
  Top Layer w15: C5.2@619,1335.54 619.46,1336 660,1336 LP1.4@668,1344
NetMT1_8: MT1.8 R4.1 | length 250.7
  Top Layer w8: R4.1@1309.72,1489 1310.72,1490 1319.72,1481 v1(1334,1481)
  Bottom Layer w8: MT1.8@1210.73,1608.73 1212.55,1606.92 1252.26,1606.92 1285,1574.18 1285,1503 1308,1480 v1@1338,1480
NetMT1_10: MT1.10 R6.1 | length 205.4
  Top Layer w8: R6.1@1307.72,1446 1308.72,1445 1327,1445 v1@1328,1444
  Bottom Layer w8: MT1.10@1210.73,1545.74 1252.26,1545.74 1269,1529 1269,1488 1311,1446 1324,1446 v1@1328,1450
  other v1: 1329,1445
NetMT2_8: MT2.8 R5.1 | length 134.6
  Bottom Layer w8: MT2.8@2077.23,1608.73 2118.76,1608.73 2138,1589.49 2138,1525 v1@2139,1524
  other v1: 2139,1527
NetMT2_10: MT2.10 R7.1 | length 113.2
  Bottom Layer w8: MT2.10@2077.23,1545.74 2080.1,1542.87 2103.13,1542.87 2118,1528 2118,1497 2140,1475 v1@2140,1472
  other v1: 2141,1474
NetMT2_30: MT2.30 R3.1 | length 212.9
  Top Layer w8: R3.1@1559,1389 1564.8,1383.2 1564.8,1364.2 1596,1333 1596,1305 v1@1643,1258
  Bottom Layer w8: v1@1643,1256 v1(1645,1256) 1683,1256 MT2.30@1688,1251
PCLK0: MT1.46 U7.6 | length 318.3
  Top Layer w10: v1@915,1383 915,1373 927,1361 951.67,1361 U7.6@952.26,1361.59
  SIG2 w8: v1(914,1385) 914.5,1385.5 914.5,1648.5 v1@916,1650
  other v1: 915,1651
PCLK1: MT2.46 U7.4 | length 1253.6
  Top Layer w8: v1@917,1318 924.59,1310.41 U7.4@952.26,1310.41
  SIG2 w8: v1(915,1317) 915,1359.13 968,1412.13 968,1631 1027,1690 1525,1690 1537,1702 1623,1702 1640,1719 1768,1719 v1(1783,1704)
  Bottom Layer w8: MT2.46@1782.49,1683 1782,1683.49 1783,1684.49 v1(1783,1704)
RST: C6.2 C7.1 H1.12 MT1.32 MT2.32 R8.2 R9.2 | length 2597.6
  Top Layer w6: H1.12@1513,1578.84 1513,1574.56 1520.6,1566.96 1633.6,1566.96 1716,1484.56 1716,1411 v1(1718,1409)
  Top Layer w8: v1@882,1196.73 R9.2@906,1196.73 ; C6.2@2153,1372 2155.27,1369.73 R8.2@2155.27,1322
  SIG1 w8: v1(882,1197) 857,1197 825,1229 v1(825,1335) 825,1372 926,1473 1113,1473 1255,1615 1536,1615 1547,1604 1572.38,1604 1718,1458.38 v1(1718,1409) 1718,1310 1737,1291 1924.87,1291 2073.87,1440 2145,1440 2155,1430 2155,1350 v1@2157,1348
  Bottom Layer w8: MT1.32@778.73,1325.27 781,1323 815,1323 v1@825,1333 ; MT2.32@1645.23,1325.27 1647.87,1327.91 1686.76,1327.91 1718,1359.15 v1(1718,1409)
  other v1: 2155,1346